# Altium PCB PCB7.PcbDoc (part 1 of 2)
Units mil, origin at the board's own origin, x right, y up, seen from the top; angles counter-clockwise.
Board outline 3935 x 3935 mil, 2 copper layers (Top Layer, Bottom Layer); 49 components, 133 nets, 415 pads, 69 vias.
Unrouted connection lines stored in the file: 1.
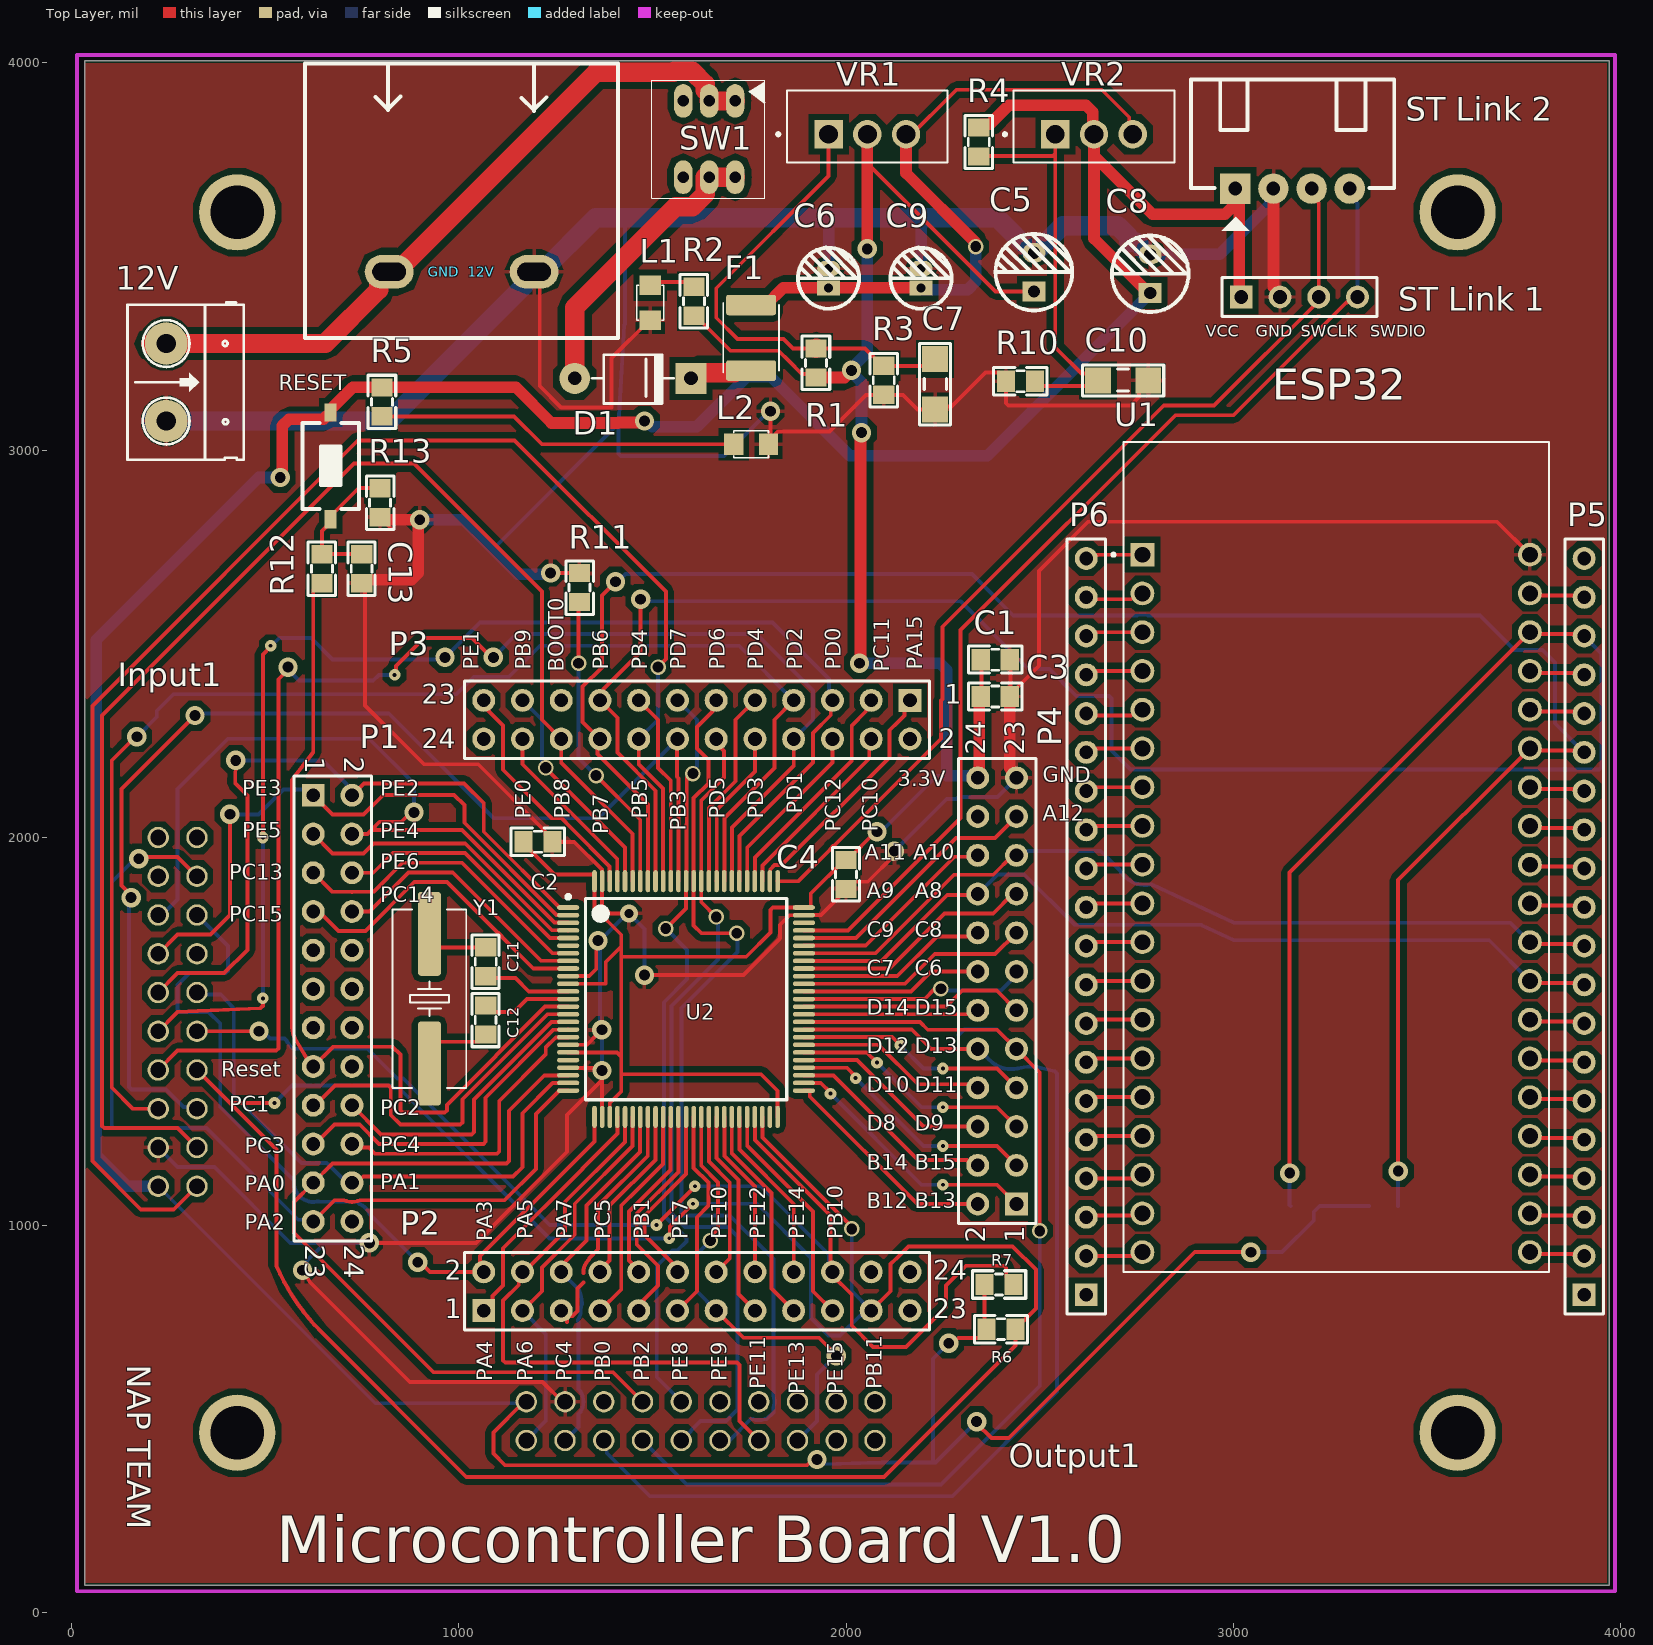
[diagram p0: Top Layer view]
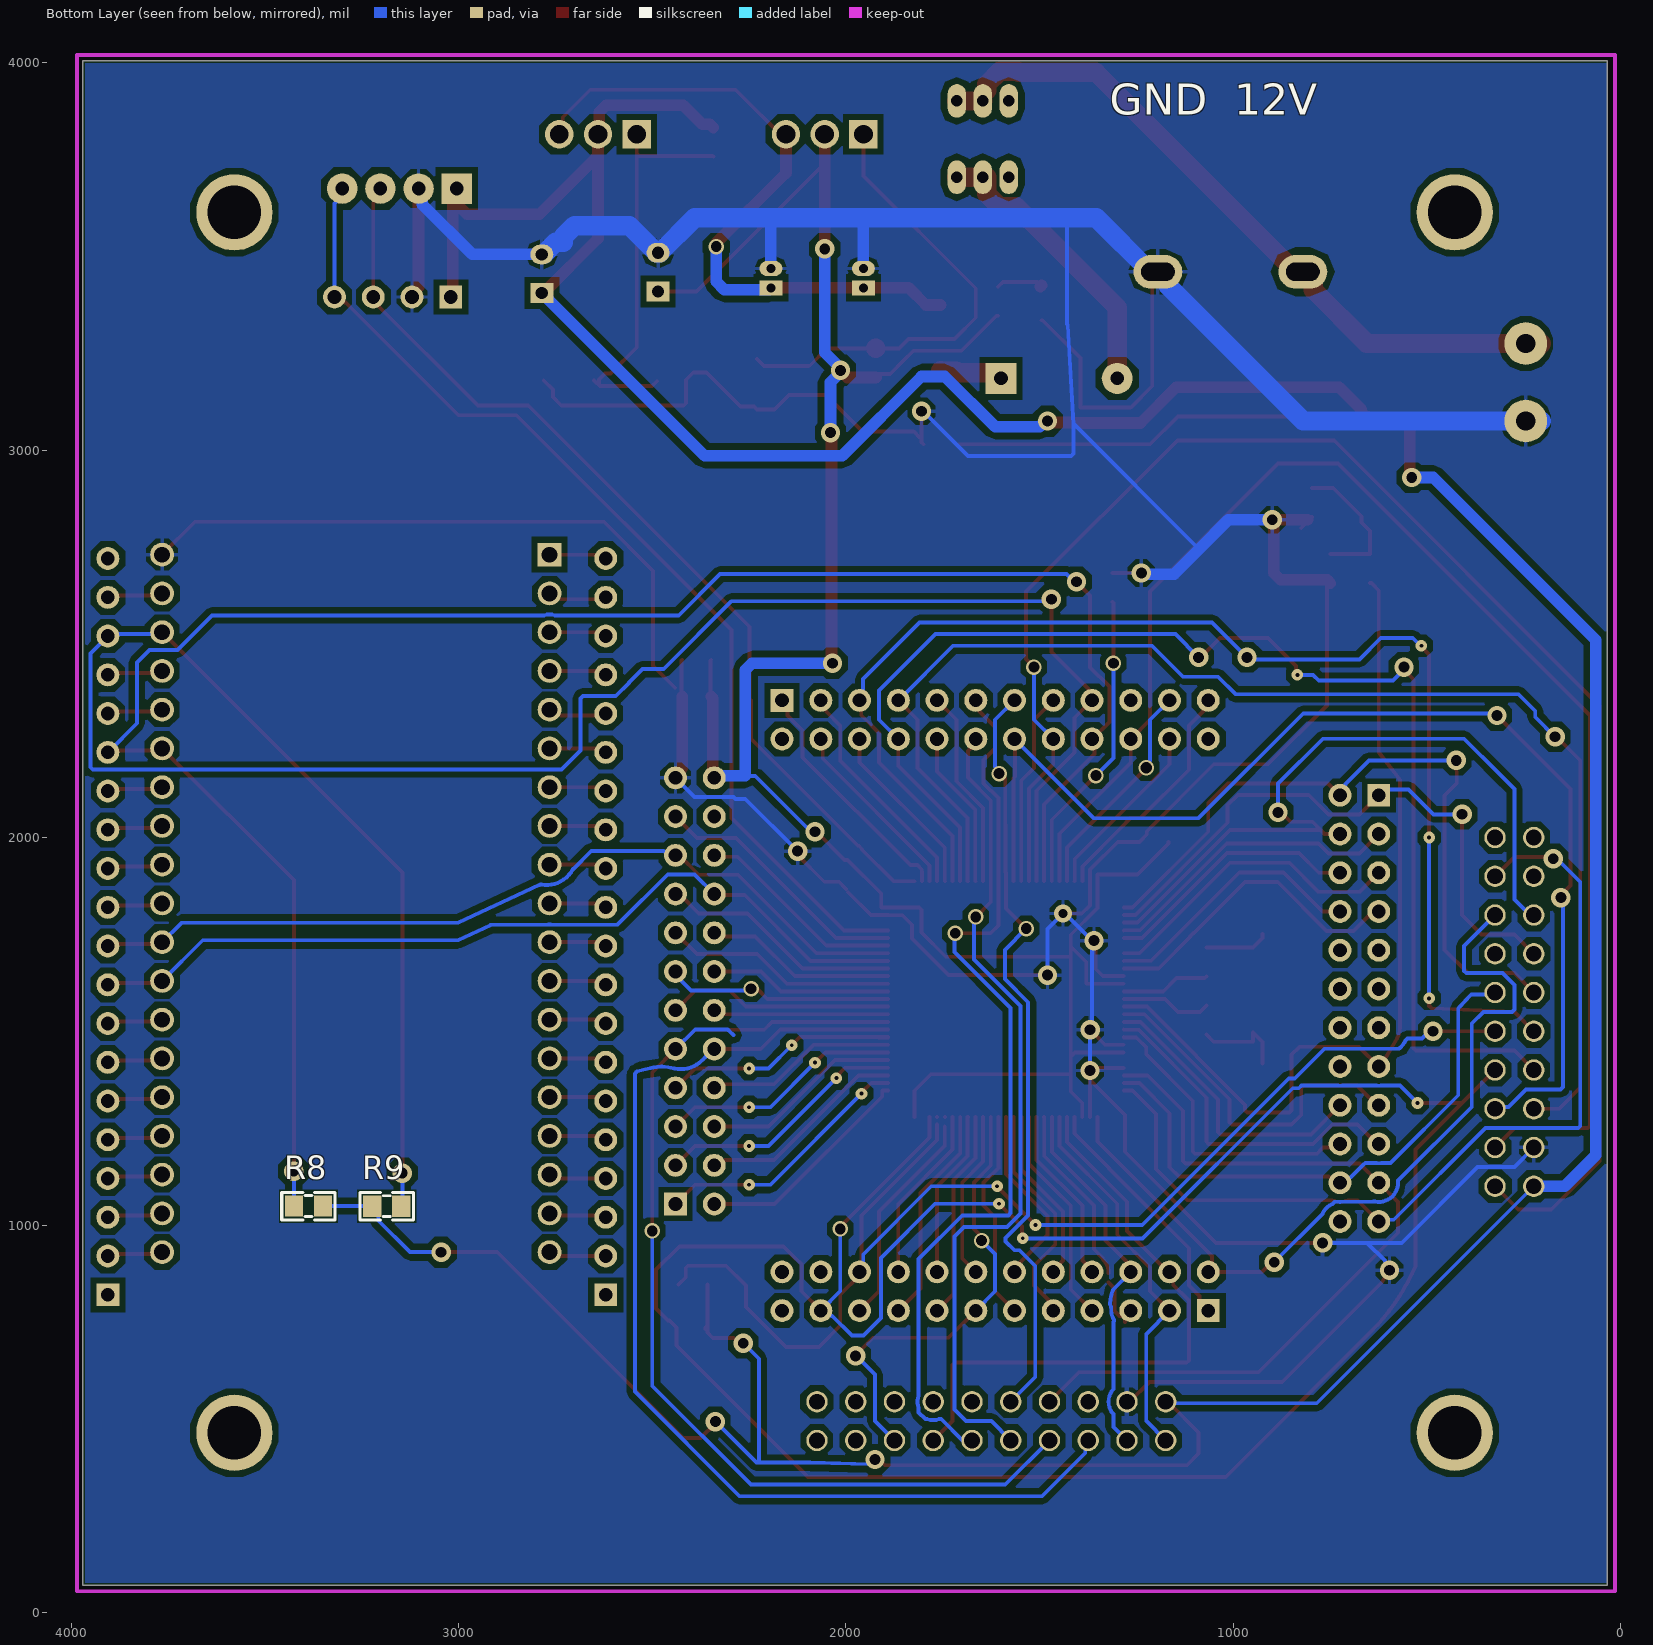
[diagram p1: Bottom Layer view, seen from below]
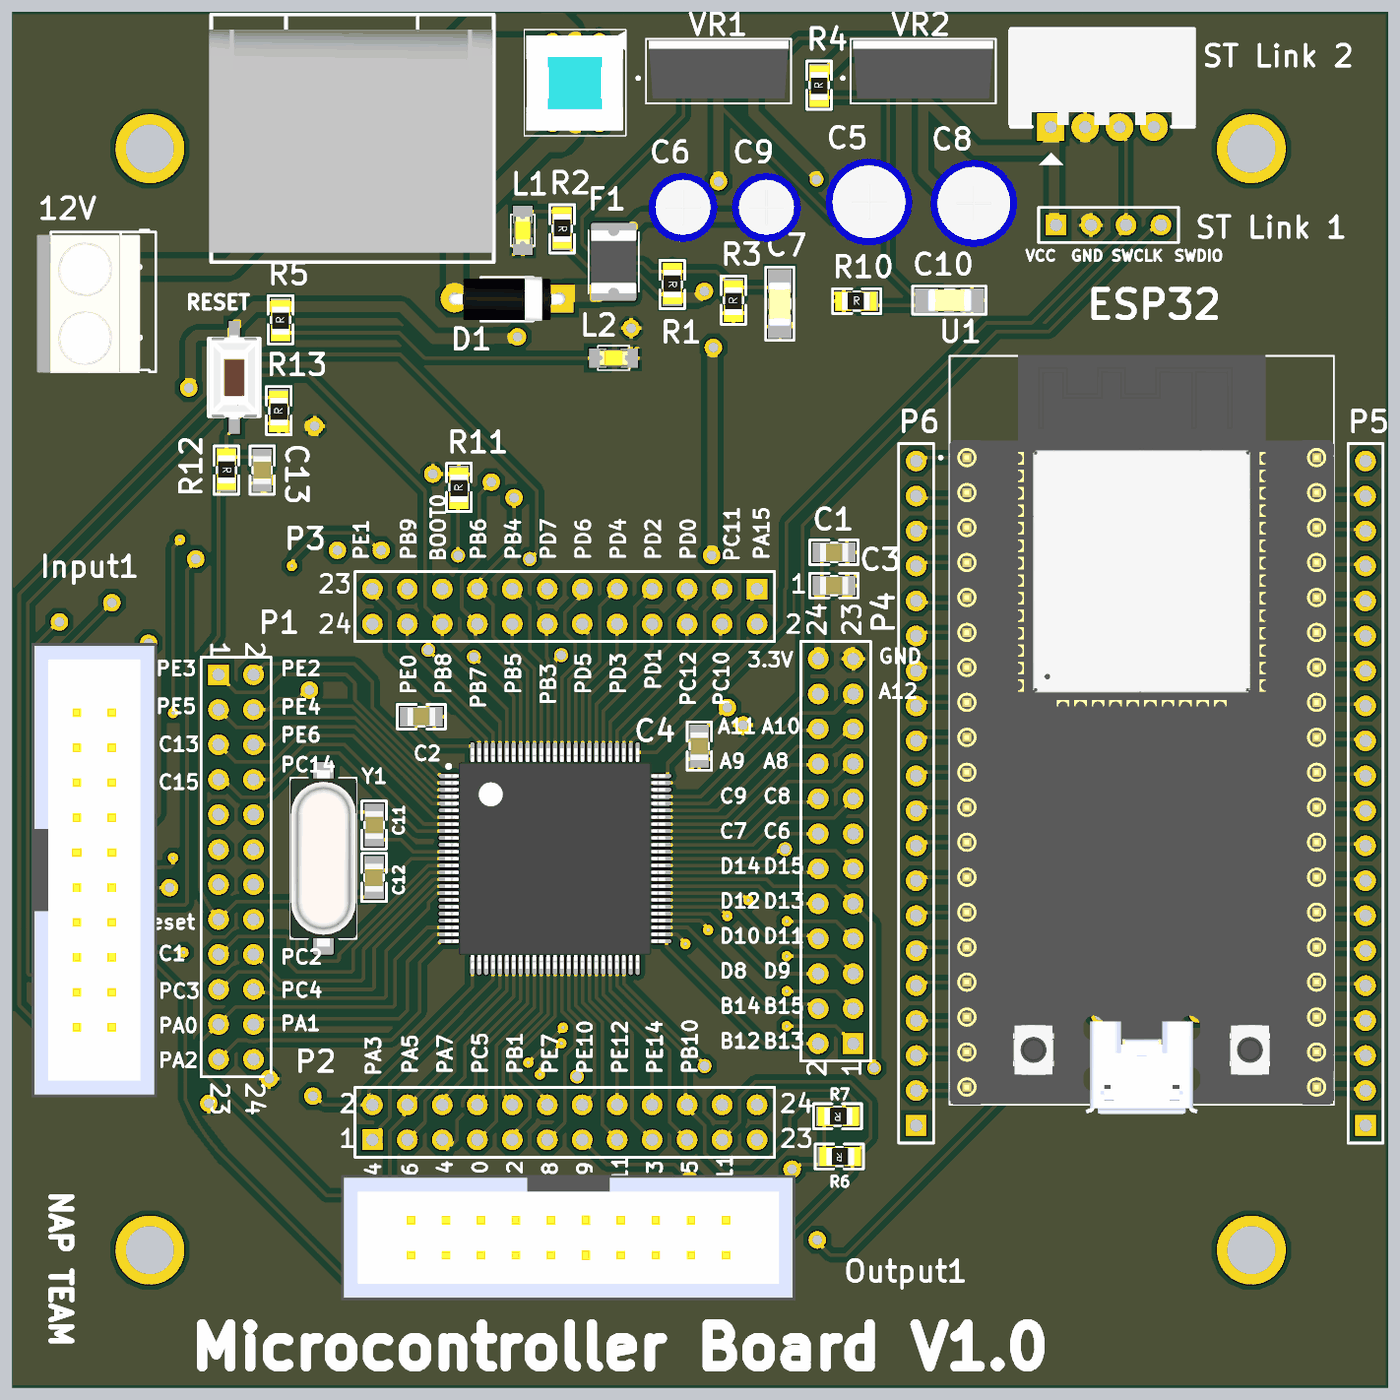
[diagram p3: 3D render of the assembled board from above, using the file's embedded part models]

## Layer stack, top to bottom
Top Solder: solder mask 0.4, Solder Resist, Dk 3.5
Top Layer: signal copper 1.4
Dielectric 1: dielectric 12.6, FR-4, Dk 4.8
Bottom Layer: signal copper 1.4
Bottom Solder: solder mask 0.4, Solder Resist, Dk 3.5

## Board outline
35,70 3970,70 3970,4005 35,4005

## Design rules (kind name [scope] priority, off if disabled: settings)
Clearance [All] p1: gap=15 ignorepadtopadclearanceinfootprint=TRUE
PolygonConnect [All] p1: connectstyle=Relief reliefconductorwidth=10 reliefentries=4 polygonreliefangle="90 Angle" airgapwidth=10
RoutingVias [All] p1: holewidth=20 width=35 viastyle="Through Hole" minholewidth=15 minwidth=30 maxholewidth=30 maxwidth=40
SolderMaskExpansion [All] p1: expansion=4 istentingtop=FALSE
Width [All] p1: maxlimit=50 minlimit=10 preferedwidth=30
30 further rules are at their usual default settings.

## Components (designator, comment, footprint, x,y, rotation, side; value= is the part's Value field where it differs from the comment)
12V "Header 2_1" HED2 245.63,3275 r270 top value="Header 2"
C1 "104" "tu 0805" 2385,2459.13 r0 top
C2 "104" "tu 0805" 1205,1989.13 r0 top
C3 "104" "tu 0805" 2385,2364.13 r0 top
C4 "104" "tu 0805" 2000,1905 r270 top
C5 "100uF" "tu hoa 5mm" 2485,3459.13 r90 top
C6 "10uF" "tu hoa 4mm" 1955,3443.54 r90 top
C7 "103" "tu 1206" 2230,3170 r270 top
C8 "100uF" "tu hoa 5mm" 2785,3455 r90 top
C9 "10uF" "tu hoa 4mm" 2193.81,3443.54 r90 top
C10 "103" "tu 1206" 2715,3180 r0 top
C11 "104" "tu 0805" 1070,1679.13 r90 top
C12 "104" "tu 0805" 1070,1529.13 r270 top
C13 "104" "tu 0805" 750,2694.13 r270 top
D1 "100v" "DIODE 1A" 1250,3185 r180 top
F1 "2A 24V" "Cau chi tu phuc hoi 2A 24V SMD1812" 1755,3289.65 r90 top
"GND  12V" "Component_1" CONN-TH_2P-P9.50_HB9500-9.5-2P 1007.99,3460 r180 top (schematic designator Header_1)
Input1 "Component_1" PCBComponent_1 225,1100 r90 top locked
L1 "LED 0805" LED-0805-Yellow 1495,3425 r270 top
L2 "LED 0805" LED-0805-Yellow 1710,3015 r0 top
Output1 "Component_1" PCBComponent_1 1175,544.13 r0 top locked
P1 "Header 12X2" HDR2X12 625,2109.13 r270 top locked
P2 "Header 12X2" HDR2X12 1065,779.13 r0 top
P3 "Header 12X2" HDR2X12 2165,2354.13 r180 top locked
P4 "Header 12X2" HDR2X12 2440,1054.13 r90 top
P5 "Header 20" HDR1X20 3905,820 r90 top
P6 "Header 20" HDR1X20 2620,820 r90 top
R1 "120R" "tro smd 0805" 1925,3225 r270 top
R2 "3.3k" "tro smd 0805" 1610,3384.13 r270 top
R3 "200R" "tro smd 0805" 2095,3180 r90 top
R4 "120R" "tro smd 0805" 2340,3795 r90 top
R5 "3.3k" "tro smd 0805" 800,3124.13 r90 top
R6 "4.7k" "tro smd 0805" 2400,729.13 r180 top
R7 "4.7k" "tro smd 0805" 2395,844.13 r180 top
R8 "4.7k" "tro smd 0805" 3387.23,1051.53 r180 bottom
R9 "4.7k" "tro smd 0805" 3185,1046.53 r0 bottom
R10 "200R" "tro smd 0805" 2450,3180 r0 top
R11 "10k" "tro smd 0805" 1310,2645 r90 top
R12 "2.2k" "tro smd 0805" 650,2694.13 r270 top
R13 "100R" "tro smd 0805" 795,2864.13 r90 top
RESET "Nut Nhan 2 Chan SMD 3x6x2.5" "Nut Nhan 2 Chan SMD 3x6x2.5" 670,2959.13 r90 top (schematic designator BT1)
"ST Link 1" "Header 4" HDR1X4 3019.93,3395.07 r0 top
"ST Link 2" "Header 4P 2.54 Duc Cong" "Header 4P DC 2.54" 3005.72,3676 r90 top
SW1 "SELF LOCK SWITCH" SW_70_31.5D47_TH_ST 1713.86,3900.98 r180 top
U1 "ESP32-DEVKITC-32D" MODULE_ESP32-DEVKITC-32D 3265,1952.05 r0 top locked
U2 "STM32F407xx-LQFP100" STM32_LQFP100 1587.2,1583.27 r0 top locked
VR1 "LM1117T-3.3/NOPB" TO254P1054X470X1955-3 2055,3815 r0 top
VR2 "LM1117T-3.3/NOPB" TO254P1054X470X1955-3 2640,3815 r0 top
Y1 "16Mhz" "Thach Anh 2 chan SMD" 925,1584.13 r90 top value=4Mhz

## Footprints (in the part's own frame and the unit in brackets; to place one, negate y for a bottom-side part, rotate by r counter-clockwise, add the part's x,y. Pads: shape width x height; smd on the part's side, far side on the other; paste and mask are expansions set on the pad)
"Cau chi tu phuc hoi 2A 24V SMD1812" [mm]
  rrect25% 1.34x3.29 smd: 1(-2.15,0) 2(2.15,0)
  silkscreen extent -2.28,-1.83 2.28,1.83, body extent -2.27,-1.62 2.27,1.62, height 1.25
CONN-TH_2P-P9.50_HB9500-9.5-2P [mm]
  oval 3.2x2.2 hole 1.2 slot 2.2 at 0 deg paste+0 mask+0.051: 1(4.75,0) 2(-4.75,0)
  silkscreen extent -10.26,-13.65 10.26,4.35, body extent -10.19,-12.54 10.41,3.65, height 19.04
"DIODE 1A" [mil] "Diode 1A"
  round 80 hole 35: 1(-50,0)
  rect 80x80 hole 35: 2(-350,0)
  silkscreen extent -305,-61 -95,65, body extent -366,-61 -34,65, height 122
HDR1X4 [mm] "Connector; Header; 4 Position"
  rect 1.5x1.5 hole 0.9: 1(0,0)
  round 1.5 hole 0.9: 2(2.54,0) 3(5.08,0) 4(7.62,0)
  silkscreen extent -1.27,-1.27 8.89,1.27
HDR1X20 [mm] "Connector; Header; 20 Position"
  rect 1.5x1.5 hole 0.9: 1(0,0)
  round 1.5 hole 0.9: 2(2.54,0) 3(5.08,0) 4(7.62,0) 5(10.16,0) 6(12.7,0) 7(15.24,0) 8(17.78,0) 9(20.32,0) 10(22.86,0) 11(25.4,0) 12(27.94,0) 13(30.48,0) 14(33.02,0) 15(35.56,0) 16(38.1,0) 17(40.64,0) 18(43.18,0) 19(45.72,0) 20(48.26,0)
  silkscreen extent -1.27,-1.27 49.53,1.27
HDR2X12 [mm] "Connector; Header; 12x2 Position"
  rect 1.5x1.5 hole 0.9: 1(0,0)
  round 1.5 hole 0.9: 2(0,2.54) 3(2.54,0) 4(2.54,2.54) 5(5.08,0) 6(5.08,2.54) 7(7.62,0) 8(7.62,2.54) 9(10.16,0) 10(10.16,2.54) 11(12.7,0) 12(12.7,2.54) 13(15.24,0) 14(15.24,2.54) 15(17.78,0) 16(17.78,2.54) 17(20.32,0) 18(20.32,2.54) 19(22.86,0) 20(22.86,2.54) 21(25.4,0) 22(25.4,2.54) 23(27.94,0) 24(27.94,2.54)
  silkscreen extent -1.27,-1.27 29.21,3.81
"Header 4P DC 2.54" [mil]
  rect 78.74x78.74 hole 35: 1(-1,1)
  round 78.74 hole 35: 2(-1,-97.42) 3(-1,-195.85) 4(-1,-294.28)
  silkscreen extent -110,-409 280,115, body extent 5,-413 278,123, height 290
HED2 [mil] "Header 2, 2 pin, hight 300mil, Pin to Pin 200, Colour Green"
  round 110 hole 50: 1(0,0) 2(200,0)
  silkscreen extent -106,-100 300,200, body extent -92,-140 302,155, height 394
LED-0805-Yellow [mil]
  rect 50x55 smd: 1(0,0) 2(90,0)
  silkscreen extent 0,-35 90,35, body extent 5,-25 85,25, height 43
MODULE_ESP32-DEVKITC-32D [mm]
  rect 1.56x1.56 / inner round 1.56 / far side rect 1.56x1.56 hole 1.04: J2-1(-12.7,19.76)
  round 1.56 hole 1.04: J2-2(-12.7,17.22) J2-3(-12.7,14.68) J2-4(-12.7,12.14) J2-5(-12.7,9.6) J2-6(-12.7,7.06) J2-7(-12.7,4.52) J2-8(-12.7,1.98) J2-9(-12.7,-0.56) J2-10(-12.7,-3.1) J2-11(-12.7,-5.64) J2-12(-12.7,-8.18) J2-13(-12.7,-10.72) J2-14(-12.7,-13.26) J2-15(-12.7,-15.8) J2-16(-12.7,-18.34) J2-17(-12.7,-20.88) J2-18(-12.7,-23.42) J2-19(-12.7,-25.96) J3-1(12.7,19.76) J3-2(12.7,17.22) J3-3(12.7,14.68) J3-4(12.7,12.14) J3-5(12.7,9.6) J3-6(12.7,7.06) J3-7(12.7,4.52) J3-8(12.7,1.98) J3-9(12.7,-0.56) J3-10(12.7,-3.1) J3-11(12.7,-5.64) J3-12(12.7,-8.18) J3-13(12.7,-10.72) J3-14(12.7,-13.26) J3-15(12.7,-15.8) J3-16(12.7,-18.34) J3-17(12.7,-20.88) J3-18(12.7,-23.42) J3-19(12.7,-25.96)
  silkscreen extent -14.7,-27.25 13.95,27.15, body extent -13.97,-27.9 13.97,27.2, height 6.69
"Nut Nhan 2 Chan SMD 3x6x2.5" [mm] "Switch SMD type"
  rect 1.2x0.8 smd: 1(-3.5,0) 2(3.5,0)
  silkscreen extent -2.82,-1.85 2.82,1.85, body extent -3.05,-1.85 3.05,1.85, height 2.5
PCBComponent_1 [mm]
  round 1.4 hole 1.04: 1(0,0) 1(0,0) 1(0,0) 1(0,0) 1(0,0) 2(2.54,0) 3(5.08,0) 4(7.62,0) 5(10.16,0) 6(12.7,0) 7(15.24,0) 8(17.78,0) 9(20.32,0) 10(22.86,0) 11(0,-2.54) 12(2.54,-2.54) 13(5.08,-2.54) 14(7.62,-2.54) 15(10.16,-2.54) 16(12.7,-2.54) 17(15.24,-2.54) 18(17.78,-2.54) 19(20.32,-2.54) 20(22.86,-2.54)
  body extent -5.06,-5.69 27.94,3.41, height 9
STM32_LQFP100 [mm] "TSQFP, 100-Leads, Body 14.00x14.00mm, Pitch 0.50mm, IPC Medium Density"
  oval 1.45x0.3 smd: 1(-7.725,6) 2(-7.725,5.5) 3(-7.725,5) 4(-7.725,4.5) 5(-7.725,4) 6(-7.725,3.5) 7(-7.725,3) 8(-7.725,2.5) 9(-7.725,2) 10(-7.725,1.5) 11(-7.725,1) 12(-7.725,0.5) 13(-7.725,0) 14(-7.725,-0.5) 15(-7.725,-1) 16(-7.725,-1.5) 17(-7.725,-2) 18(-7.725,-2.5) 19(-7.725,-3) 20(-7.725,-3.5) 21(-7.725,-4) 22(-7.725,-4.5) 23(-7.725,-5) 24(-7.725,-5.5) 25(-7.725,-6) 51(7.725,-6) 52(7.725,-5.5) 53(7.725,-5) 54(7.725,-4.5) 55(7.725,-4) 56(7.725,-3.5) 57(7.725,-3) 58(7.725,-2.5) 59(7.725,-2) 60(7.725,-1.5) 61(7.725,-1) 62(7.725,-0.5) 63(7.725,0) 64(7.725,0.5) 65(7.725,1) 66(7.725,1.5) 67(7.725,2) 68(7.725,2.5) 69(7.725,3) 70(7.725,3.5) 71(7.725,4) 72(7.725,4.5) 73(7.725,5) 74(7.725,5.5) 75(7.725,6)
  oval 0.3x1.45 smd: 26(-6,-7.725) 27(-5.5,-7.725) 28(-5,-7.725) 29(-4.5,-7.725) 30(-4,-7.725) 31(-3.5,-7.725) 32(-3,-7.725) 33(-2.5,-7.725) 34(-2,-7.725) 35(-1.5,-7.725) 36(-1,-7.725) 37(-0.5,-7.725) 38(0,-7.725) 39(0.5,-7.725) 40(1,-7.725) 41(1.5,-7.725) 42(2,-7.725) 43(2.5,-7.725) 44(3,-7.725) 45(3.5,-7.725) 46(4,-7.725) 47(4.5,-7.725) 48(5,-7.725) 49(5.5,-7.725) 50(6,-7.725) 76(6,7.725) 77(5.5,7.725) 78(5,7.725) 79(4.5,7.725) 80(4,7.725) 81(3.5,7.725) 82(3,7.725) 83(2.5,7.725) 84(2,7.725) 85(1.5,7.725) 86(1,7.725) 87(0.5,7.725) 88(0,7.725) 89(-0.5,7.725) 90(-1,7.725) 91(-1.5,7.725) 92(-2,7.725) 93(-2.5,7.725) 94(-3,7.725) 95(-3.5,7.725) 96(-4,7.725) 97(-4.5,7.725) 98(-5,7.725) 99(-5.5,7.725) 100(-6,7.725)
  silkscreen extent -7.85,-6.6 6.6,6.82, body extent -8,-8 8,8, height 1.6
SW_70_31.5D47_TH_ST [mm] "CASE: TH"
  oval 1.2x2.2 hole 0.75: 0(3.4,5) 0(3.4,0) 1(0,0) 2(1.7,0) 3(1.7,5) 4(0,5)
  silkscreen extent -1.98,-1.35 5.46,6.38, body extent -1.74,-0.91 5.3,5.99, height 13.54
"Thach Anh 2 chan SMD" [mm] "SMD Crystal HC49/US-SM package"
  round 0.508 on Mech15: 0(0,0)
  rrect25% 5.5x1.5 smd: 1(-4.25,0) 2(4.25,0)
  silkscreen extent -5.84,-2.41 5.84,2.41, body extent -6.4,-2.41 6.4,2.42, height 4.29
TO254P1054X470X1955-3 [mm]
  rect 1.86x1.86 / inner round 1.86 / far side rect 1.86x1.86 hole 1.24: 1(-2.54,0)
  round 1.86 hole 1.24: 2(0,0) 3(2.54,0)
  silkscreen extent -5.94,-1.84 5.27,2.86, body extent -5.08,-1.48 5.08,2.71, height 22.86
"tro smd 0805" [mm]
  rect 1.2x1.4 smd: 1(-0.946,-0.061) 2(0.954,-0.061)
  silkscreen extent -1.75,-0.97 1.75,0.84, body extent -1.56,-0.76 1.44,0.64, height 0.53
"tu 0805" [mm] "Compoment SMD 80x50mil"
  rect 1.2x1.4 smd: 1(-0.946,-0.003) 2(0.954,-0.003)
  silkscreen extent -1.75,-0.89 1.75,0.89, body extent -1.01,-0.64 1.01,0.63, height 0.61
"tu 1206" [mm]
  rect 1.7x1.7 smd: 1(-1.65,0) 2(1.65,0)
  silkscreen extent -2.67,-1.02 2.67,1.02, body extent -1.57,-0.8 1.63,0.8, height 0.94
"tu hoa 4mm" [mm]
  rect 1x1.5 hole 0.6: 1(-0.635,0)
  oval 1x1.5 hole 0.6: 2(0.635,0)
  silkscreen extent -2,-2 2.01,2.01, body extent -2.47,-2.47 2.58,2.58, height 14.81
"tu hoa 5mm" [mm]
  rect 1.3x1.5 hole 0.8: 1(-1.27,0)
  oval 1.3x1.5 hole 0.8: 2(1.27,0)
  silkscreen extent -2.51,-2.51 2.51,2.51, body extent -3.12,-3.18 3.23,3.18, height 14.55

## Part data
12V: "Header, 2-Pin", Manufacturer="Generic Components", Class=Connector
C1 C2 C3 C4 C11 C12 C13: library part "Tu 0805 104 50V 10%", "Dán", Chung_Loai=Dán, Don_Vi=Con, Ma_Hang=MH004551, So_Chan=2, Ten_Linh_Kien="Tụ 0805 104-100nF 10% 50V"
C5 C8: library part "Tu Hoa 100uF 16V 5x11", "Cắm", Chung_Loai=Cắm, Don_Vi=Con, Ma_Hang=MH008417, So_Chan=2, Ten_Linh_Kien="Tụ Hóa 100uF 16V 5x11MM"
C6 C9: library part "Tu Hoa 10uF 25V 4x7", "Cắm", Chung_Loai=Cắm, Don_Vi=Con, Ma_Hang=MH001349, So_Chan=2, Ten_Linh_Kien="Tụ Hóa 10uF 25V 4x7MM"
C7 C10: library part "Tu 1206 103 50V 10%", "Dán", Chung_Loai=Dán, Don_Vi=Con, Ma_Hang=MH004543, So_Chan=2, Ten_Linh_Kien="Tụ 1206 103-10nF 10% 50V"
D1: library part "Diode 1N4007", "Cắm", Chung_Loai=Cắm, Don_Vi=Con, Ma_Hang=MH001063, Ten_Linh_Kien="Diode 1N4007 1A (DIP)"
F1: library part "Cau chi tu phuc hoi 2A 24V SMD1812", "2A 24V SMD1812", Ma_Hang=MH010033, Ten="Cầu Chì Tự Phục Hồi 2A 24V SMD1812"
Input1 Output1: "DC3_20pin"
L1 L2: library part "LED 0805 Trang", "Dán", Chung_Loai=Dán, Don_Vi=Con, Ma_Hang=MH002946, Ten_Linh_Kien="LED 0805 Màu Trắng ( White)"
P1 P2 P3 P4: "Header, 12-Pin, Dual row", LatestRevisionDate=17-Jul-2002, LatestRevisionNote="Re-released for DXP Platform.", Publisher="Altium Limited"
P5 P6: "Header, 20-Pin", LatestRevisionDate=17-Jul-2002, LatestRevisionNote="Re-released for DXP Platform.", Publisher="Altium Limited"
R1 R4: library part "Tro 0805 5% 120R", "Dán", Chung_Loai=Dán, Don_Vi=Con, Ma_Hang=MH005253, So_Chan=2, Ten_Linh_Kien="Trở 0805 5% 120R"
R2 R5: library part "Tro 0805 1% 3.3k", "Dán", Chung_Loai=Dán, Don_Vi=Con, Ma_Hang=MH005472, So_Chan=2, Ten_Linh_Kien="Trở 0805 1% 3.3k"
R3 R10: library part "Tro 0805 5% 200R", "Dán", Chung_Loai=Dán, Don_Vi=Con, Ma_Hang=MH005257, So_Chan=2, Ten_Linh_Kien="Trở 0805 5% 200R"
R6 R7 R8 R9: library part "Tro 0805 5% 4.7k", "Dán", Chung_Loai=Dán, Don_Vi=Con, Ma_Hang=MH005307, So_Chan=2, Ten_Linh_Kien="Trở 0805 5% 4.7k"
R11: library part "Tro 0805 5% 10k", "Dán", Chung_Loai=Dán, Don_Vi=Con, Ma_Hang=MH005239, So_Chan=2, Ten_Linh_Kien="Trở 0805 5% 10k"
R12: library part "Tro 0805 5% 2.2k", "Dán", Chung_Loai=Dán, Don_Vi=Con, Ma_Hang=MH005237, So_Chan=2, Ten_Linh_Kien="Trở 0805 5% 2.2k"
R13: library part "Tro 0805 5% 100R", "Dán", Chung_Loai=Dán, Don_Vi=Con, Ma_Hang=MH005251, So_Chan=2, Ten_Linh_Kien="Trở 0805 5% 100R"
"ST Link 1": "Header, 4-Pin", LatestRevisionDate=17-Jul-2002, LatestRevisionNote="Re-released for DXP Platform.", Publisher="Altium Limited"
"ST Link 2": "Cắm", Chung_Loai=Cắm, Don_Vi=Con, Ma_Hang=MH001310, Ten_Linh_Kien="Header 4P XH2.54-4P Đực Cong"
SW1: library part SW1_LOCAL-TH, "6 Pin DPDT Mini Push Button Self-locking Switch Multimeter Switch", Alternate Part Number-1=NA, Case/Package=TH, Manufacturer=NA, Manufacturer Part Number=NA, Supplier Part Number-1=NA, Supplier-1="SP ROAD"
U1: "WiFi Development Tools (802.11) ESP32 General Development Kit, ESP32-WROOM-32D on the board", Package=None, Check_prices=https://www.snapeda.com/parts/ESP32-DEVKITC-32D/Espressif+Systems/view-part/?ref=eda, MF="Espressif Systems", MP=ESP32-DEVKITC-32D, SnapEDA_Link=https://www.snapeda.com/parts/ESP32-DEVKITC-32D/Espressif+Systems/view-part/?ref=snap
VR1 VR2: "800-mA 15-V linear voltage regulator", Package="TO-220-3 Texas Instruments", Availability="In Stock", Check_prices=https://www.snapeda.com/parts/LM1117T-3.3/NOPB/Texas+Instruments/view-part/?ref=eda, MF="Texas Instruments", MP=LM1117T-3.3/NOPB, Price=None, Purchase-URL=https://pricing.snapeda.com/search/part/LM1117T-3.3/NOPB/?ref=eda, SnapEDA_Link=https://www.snapeda.com/parts/LM1117T-3.3/NOPB/Texas+Instruments/view-part/?ref=snap
Y1: library part "Thach Anh 2 chan SMD", "Crystal For all Crystal 2pin."
RESET: Ma_Hang=MH001036, Ten="Nút Nhấn 2 Chân 3x6x2.5MM SMD"

## Free pads (board coordinates)
  round 196.85 hole 137.8: 2(428.7,463.7) 2(428.7,3613.31) 2(3578.31,463.7) 2(3578.31,3613.31)

## Via types
v1: diameter 50, hole 28, Top Layer to Bottom Layer, 38 vias
v2: diameter 30, hole 10, Top Layer to Bottom Layer, 17 vias
v3: diameter 40, hole 28, Top Layer to Bottom Layer, 12 vias
v4: diameter 40, hole 30, Top Layer to Bottom Layer, 1 vias
v5: diameter 47.24, hole 23.62, Top Layer to Bottom Layer, 1 vias

## Nets (pads, with @x,y where several pads share a name; then routed paths per layer and width w, separated by ;. In a path a pad name is that pad's centre, name@x,y a point inside that pad or via, vN(x,y) a via of type N, cw(c..) or ccw(c..) an arc to the next point about the centre after c; other vN are vias at no path point)
"+3.3 VDK": C1.1 C2.1 C3.1 C4.1 C5.1 P4.24 R1.2 R2.2 U2.11 U2.20 U2.28 U2.50 U2.75 U2.100 VR1.2 | length 6139.7
  Top Layer w10: C2.1@1167.77,1989 1167.77,1985.06 1247.8,1905.04 1350.15,1905.04 1350.98,1904.2 1350.98,1818.15 1420,1749.13 1420,1719.13 ; U2.20@1283.07,1445.47 1408.66,1445.47 1420,1434.13 ; U2.11@1283.07,1622.64 1380,1622.64 1380,1679.13 1420,1719.13 ; U2.28@1390.35,1279.13 1390.35,1315.35 1420,1345 1420,1389.13 ; R2.2@1607.61,3346.56 1611.54,3346.56 1701.72,3256.38 1826.26,3256.38 1853.15,3229.48 1885.91,3196.73 1913.3,3196.73 R1.2@1922.61,3187.43 ; U2.50@1823.43,1279.13 1823.43,1346.57 1780.87,1389.13 1420,1389.13 ; 2055,3740 2385.87,3409.13 C5.1@2485,3409.13 ; v1(2080,2015) 2076.57,2015 2003.8,1942.23 C4.1@1999.87,1942.23 1995.93,1942.23 1908.98,1855.28 1908.98,1820.33 1908.14,1819.49 U2.75@1891.34,1819.49 1890.99,1819.14 1810.86,1819.14 1805,1813.28 1805,1755 1742.53,1692.53 1420,1692.53 ; C3.1@2347.77,2364 2350,2366.23 2350,2456.77 C1.1@2347.77,2459 ; 1420,1389.13 1420,1434.13 ; 1420,1434.13 1420,1692.53 ; 1420,1692.53 1420,1719.13
  Top Layer w30: R1.2@1922.61,3187.43 1997.19,3187.43 2014.32,3204.55 v1(2014.32,3205.71) ; v1(2035,2450) 2037.5,2452.5 2037.5,3042.5 v1(2040,3045) ; v1(2055,3519.13) 2055,3740 VR1.2@2055,3800 ; P4.24@2340,2154.13 2343.89,2158.02 2343.89,2360.11 C3.1@2347.77,2364
  Bottom Layer w10: v1(2080,2015) 2090,2015 2234.13,2159.13 2260,2159.13
  Bottom Layer w30: v1(2035,2450) 2242.43,2450 2260,2432.43 2260,2159.13 2335,2159.13 P4.24@2340,2154.13 ; v1(2040,3045) 2040,3174.62 2014.32,3200.3 2014.32,3211.13 2055,3251.81 v1(2055,3519.13)
+12: 12V.1 "GND  12V.1" SW1.1 SW1.2 | length 1856
  Top Layer w50: 12V.1@205,3275 213.52,3266.48 255.77,3266.48 264.29,3275 655.66,3275 794.29,3413.62 794.29,3443.09 811.2,3460 840.66,3460 1355.66,3975 1554.25,3975 1556.55,3977.29 1603.45,3977.29 1636.62,3944.12 1636.62,3928.22 SW1.2@1645.55,3919.29 ; SW1.2@1646.93,3900.98 SW1.1@1713.86,3900.98
Boot0: R11.1 U2.94 | length 787.3
  Top Layer w10: v3(1310,2450) 1310,2605.38 R11.1@1312.39,2607.77 ; v3(1355,2160) 1469.09,2045.91 U2.94@1469.09,1887.4
  Bottom Layer w10: v3(1310,2450) 1310,2205 v3(1355,2160)
Buzzer: Input1.17
CLK: Input1.13 P3.14 U2.89 | length 3060.7
  Top Layer w10: v1(155,1845) 155,1851.57 130,1876.57 130,2125 v1(320,2315) ; P3.14@1565,2254.13 1563.67,2252.8 1563.67,2156.79 1567.52,2152.94 U2.89@1567.52,1887.4
  Bottom Layer w10: v1(155,1845) 150,1840 150,1355.86 155.86,1350 245,1350 289.91,1305.09 319.91,1305.09 Input1.13@325,1300 ; v1(320,2315) 325,2320 820,2320 1090,2050 1360.87,2050 P3.14@1565,2254.13
CS: Input1.12 P3.20 U2.95 | length 3712.9
  Top Layer w10: Input1.12@325,1200 275,1250 85.86,1250 80,1255.86 80,2315 730,2965 885,2965 1215,2635 1215,2304.13 P3.20@1265,2254.13 1265,2194.13 1449.41,2009.72 U2.95@1449.41,1887.4
Den_Run: Input1.6 P1.2 U2.1 | length 1870.8
  Top Layer w10: Input1.6@225,1600 275,1650 395,1650 455,1710 455,2108.63 426.69,2136.95 423.76,2139.87 423.76,2144.24 v1(425,2199.13) ; P1.2@725,2109.13 755.87,2140 1014.13,2140 1065,2089.13 1065,2015 1260.51,1819.49 U2.1@1283.07,1819.49
  Bottom Layer w10: v1(425,2199.13) 650,2199.13 711.01,2138.12 711.01,2136.39 725,2122.41 P1.2@725,2109.13
Den_Stop: Input1.7 P1.1 U2.2 | length 1589.2
  Top Layer w10: Input1.7@225,1700 275,1750 360,1750 410,1800 v1(410,2060) ; P1.1@625,2109.13 675,2059.13 755,2059.13 805.87,2110 988.63,2110 1015,2083.63 1015,2038.19 1253.04,1800.15 1282.72,1800.15 U2.2@1283.07,1799.8
  Bottom Layer w10: v1(410,2060) 484.01,2060 548.15,2124.13 610,2124.13 P1.1@625,2109.13
Den_Warning: Input1.8 P1.4 U2.3 | length 1927.8
  Top Layer w10: P1.4@725,2009.13 765,2009.13 775,2019.13 ; v1(885,2065) 876.95,2065 852.69,2040.74 796.61,2040.74 775,2019.13 ; U2.3@1283.07,1780.12 1282.72,1780.46 1247.26,1780.46 1008.6,2019.13 775,2019.13
  Bottom Layer w10: Input1.8@225,1800 235,1800 275,1840 275,2125 315,2165 405,2255 769.13,2255 885,2139.13 v1(885,2065)
DIN: Input1.11 P3.16 U2.91 | length 4249.7
  Top Layer w10: Input1.11@325,1100 265,1040 180,1040 55,1165 55,2340 740,3025 1145,3025 1535,2635 1535,2460.86 1515,2440.86 v3(1515,2440) ; P3.16@1465,2254.13 1465,2189.59 1528.15,2126.44 U2.91@1528.15,1887.4
  Bottom Layer w10: P3.16@1465,2254.13 1515,2304.13 v3(1515,2440)
DIR_L: Output1.15 P3.12 U2.86 | length 2156.6
  Top Layer w10: v3(1665,1795) 1626.57,1833.43 U2.86@1626.57,1887.4 1626.57,2096.12 1685,2154.54 1685,2223.75 1665,2243.75 P3.12@1665,2254.13
  Bottom Layer w10: Output1.15@1575,444.13 1625,494.13 1690,494.13 1720,524.13 1720,970 1695,995 1584.81,995 1550,1029.81 1550,1565 1670,1685 1670,1790 v3(1665,1795) ; P3.12@1655.61,2244.75 P3.12@1665,2254.13
DIR_R: Output1.16 P3.11 U2.87 | length 2387.6
  Top Layer w10: P3.11@1665,2354.13 1655.61,2344.75 1655.61,2325.61 1615,2285 1615,2230 1645,2200 1645,2140 1606.89,2101.89 U2.87@1606.89,1887.4 1606.89,1773.11 1626.94,1753.06 v3(1718.06,1753.06)
  Bottom Layer w10: Output1.16@1675,444.13 1699.13,444.13 1754.08,499.08 1758.22,499.08 1759.78,499.08 ccw(c1775,544.13) 1789.06,498.7 cw(c1791.97,489.13) 1791.97,499.13 1795,499.13 1812.56,516.69 1812.56,528.83 ccw(c1775,544.13) 1812.56,559.44 1812.56,912.44 1700,1025 1580.86,1025 1575,1030.86 1575,1560 1720,1705 1720,1755 v3(1718.06,1753.06)
DIR_STEPPER: Output1.5 P3.13 U2.88 | length 2003.4
  Top Layer w10: v3(1535,1765) 1587.2,1817.2 U2.88@1587.2,1887.4 1587.2,1910.04 1587.98,1911.31 1587.98,1917.87 1588.89,2154.35 1594.35,2154.35 v3(1605,2165)
  Bottom Layer w10: v3(1535,1765) 1590,1710 1590,1635 1530,1575 1530,1024.36 1588.04,966.32 1588.04,958.04 1565,935 1552.53,935 1511.67,894.14 1511.67,607.46 Output1.5@1575,544.13 ; P3.13@1565,2354.13 1615,2304.13 1615,2183.12 1605,2173.12 v3(1605,2165)
Encoder_L1: Output1.13 P4.10 U2.59 | length 2875.9
  Top Layer w10: U2.59@1891.34,1504.53 2169.61,1504.53 2220,1454.13 P4.10@2340,1454.13
  Bottom Layer w10: Output1.13@1375,444.13 1382.59,436.54 1382.59,411.54 1494.13,300 2275,300 2545,570 2545,1387.22 2545,1388.75 2544.54,1390.22 ccw(c2535,1387.22) 2537.93,1396.78 ccw(c2432.17,1039.08) 2476.87,1409.4 ccw(c2475.7,1399.46) 2474.8,1409.42 ccw(c2496.65,1168.84) 2442.64,1404.3 cw(c2425.79,1479.31) 2378.42,1418.76 cw(c2433.9,1489.7) 2353.21,1449.71 P4.10@2352.07,1450.85 ; P4.10@2340,1454.13 2345.67,1453.75 2349.42,1453.5 P4.10@2352.04,1450.88
Encoder_L2: Output1.14 P4.9 U2.60 | length 2826.5
  Top Layer w10: U2.60@1891.34,1524.21 1891.42,1524.13 2190.87,1524.13 2210.87,1504.13 2390,1504.13 P4.9@2440,1454.13 2497.07,1397.06 2500,1394.13 v3(2500,985)
  Bottom Layer w10: Output1.14@1475,444.13 1589.13,330 2245,330 2500,585 v3(2500,985) ; 2290,1490 2300,1500 cw(c2320.17,1479.83) 2306.75,1505 2389.13,1505 P4.9@2440,1454.13
Encoder_R1: Output1.11 P2.3 U2.31 | length 998.4
  Top Layer w10: P2.3@1165,779.13 1215,829.13 1215,890 1300,975 1300,1055 1449.06,1204.06 1449.06,1278.79 U2.31@1449.41,1279.13
  Bottom Layer w10: P2.3@1165,779.13 1225,719.13 1225,494.13 Output1.11@1175,444.13
Encoder_R2: Output1.12 P2.6 U2.32 | length 960.3
  Top Layer w10: P2.6@1255,885 1330,960 1330,1050 1468.75,1188.75 1468.75,1278.79 U2.32@1469.09,1279.13
  Bottom Layer w10: P2.6@1265,879.13 1310.25,833.88 cw(c1228.79,796.43) 1311.05,832.09 cw(c1228.79,796.43) 1318.44,797.85 cw(c1308.44,797.69) 1317.95,794.61 ccw(c1365,779.13) 1315.57,776 cw(c1305.6,775.31) 1315.24,772.66 cw(c1228.79,796.43) 1309.69,757.78 ccw(c1318.74,753.54) 1309.18,750.62 ccw(c1314.64,752.33) 1309.31,750.24 1310,748.98 1310,576.33 cw(c1275,544.13) 1310,511.93 1310,479.13 Output1.12@1275,444.13
ESP_Pin_02: P5.19 U1.J3-2 | length 144.1
  Top Layer w10: U1.J3-2@3765,2630 3770,2625 3900,2625 P5.19@3905,2620
ESP_Pin_04: P5.17 U1.J3-4 | length 144.1
  Top Layer w10: U1.J3-4@3765,2430 3770,2425 3900,2425 P5.17@3905,2420
ESP_Pin_05: P5.16 U1.J3-5 | length 144.1
  Top Layer w10: U1.J3-5@3765,2330 3770,2325 3900,2325 P5.16@3905,2320
ESP_Pin_07: P5.14 U1.J3-7 | length 144.1
  Top Layer w10: U1.J3-7@3765,2130 3770,2125 3900,2125 P5.14@3905,2120
ESP_Pin_08: P5.13 U1.J3-8 | length 144.1
  Top Layer w10: U1.J3-8@3765,2030 3770,2025 3900,2025 P5.13@3905,2020
ESP_Pin_09: P5.12 U1.J3-9 | length 144.1
  Top Layer w10: U1.J3-9@3765,1930 3770,1925 3900,1925 P5.12@3905,1920
ESP_Pin_10: P5.11 U1.J3-10 | length 144.1
  Top Layer w10: U1.J3-10@3765,1830 3770,1825 3900,1825 P5.11@3905,1820
ESP_Pin_13: P5.8 U1.J3-13 | length 144.1
  Top Layer w10: U1.J3-13@3765,1530 3770,1525 3900,1525 P5.8@3905,1520
ESP_Pin_14: P5.7 U1.J3-14 | length 144.1
  Top Layer w10: U1.J3-14@3765,1430 3770,1425 3900,1425 P5.7@3905,1420
ESP_Pin_15: P5.6 U1.J3-15 | length 144.1
  Top Layer w10: U1.J3-15@3765,1330 3770,1325 3900,1325 P5.6@3905,1320
ESP_Pin_16: P5.5 U1.J3-16 | length 144.1
  Top Layer w10: U1.J3-16@3765,1230 3770,1225 3900,1225 P5.5@3905,1220
ESP_Pin_17: P5.4 U1.J3-17 | length 144.1
  Top Layer w10: U1.J3-17@3765,1130 3770,1125 3900,1125 P5.4@3905,1120
ESP_Pin_18: P5.3 U1.J3-18 | length 144.1
  Top Layer w10: U1.J3-18@3765,1030 3770,1025 3900,1025 P5.3@3905,1020
ESP_Pin_19: P5.2 U1.J3-19 | length 144.1
  Top Layer w10: U1.J3-19@3765,930 3770,925 3900,925 P5.2@3905,920
GND: 12V.2 "GND  12V.2" "ST Link 1.2" "ST Link 2.2" C1.2 C2.2 C3.2 C4.2 C5.2 C6.2 C7.2 C8.2 C9.2 C10.2 C13.2 Input1.2 L1.2 L2.2 Output1.2 P4.23 R3.1 R10.1 R11.2 R13.1 U1.J3-1 U2.10 U2.19 U2.22 U2.27 U2.74 U2.99 | length 16246.3
  Top Layer w10: v1(597.25,883.45) 617.43,851.71 623.28,845.85 747.01,722.12 874.13,595 1217.06,595 1267.93,544.13 Output1.2@1275,544.13 ; C13.2@759.08,2647.61 759.08,2340.92 910.87,2189.13 1050.87,2189.13 1223.95,2016.05 1223.95,2007.62 C2.2@1242.57,1989 1298.76,1989 1369.89,1917.87 1369.89,1911.31 1370.67,1910.53 U2.99@1370.67,1887.4 1370.67,1824.99 1391.53,1804.13 v5(1440,1804.13) ; v1(770,954.13) 1045,954.13 1280,1189.13 1280,1284.13 v1@1370.33,1374.47 ; R13.1@797.39,2826.91 801.33,2826.91 808.24,2820 815,2813.24 815,2809.3 825,2799.3 ; 1195,3460 1209.68,3445.32 1209.68,3165.32 1265,3110 1395,3110 1395,3237.5 1492.5,3335 L1.2@1495,3335 ; v1(1237.86,2682.86) 1312.11,2682.86 R11.2@1312.39,2682.57 ; U2.22@1283.07,1406.1 1283.42,1405.76 1363.38,1405.76 v1(1370.33,1398.8) v1@1370.33,1374.47 ; U2.19@1283.07,1465.16 1331.02,1465.16 v1@1358.65,1492.78 ; U2.10@1283.07,1642.32 1337.32,1642.32 1355.33,1660.33 1355.33,1729.46 v1(1360,1734.13) ; U2.27@1370.67,1279.13 1370.33,1279.47 v1@1370.33,1374.47 ; v1(1480,1645) 1735,1645 1830,1740 1830,1775 1854.46,1799.46 1890.99,1799.46 U2.74@1891.34,1799.8 1935.67,1799.8 C4.2@1994.87,1859 ; L2.2@1800,3015 1805,3020 v1(1805,3100) ; L2.2@1810,3032.5 1825,3047.5 1957.5,3047.5 2051.91,3141.91 2096.53,3141.91 R3.1@2097.39,3142.77 2098.26,3141.91 2147.23,3141.91 2184.09,3105.04 C7.2@2230,3105.04 2237.57,3112.61 2272.61,3112.61 2360.17,3200.17 2394.15,3200.17 2412.77,3181.54 R10.1@2412.77,3177.61 2412.77,3120.86 2418.63,3115 2734.96,3115 2756.5,3136.54 2756.5,3156.54 C10.2@2779.96,3180 ; C4.2@1999.87,1867.43 2018.49,1886.05 2056.05,1886.05 2125,1955 v1(2125,1965) ; C3.2@2422.57,2364 2425,2366.43 2425,2456.58 C1.2@2422.57,2459 ; C3.2@2441.2,2386.56 2497.97,2443.34 2497.97,2687.97 2625,2815 3680,2815 U1.J3-1@3765,2730
  Top Layer w30: C13.2@749.87,2656.56 758.49,2665.18 878.6,2665.18 896.17,2682.76 896.17,2816.17 v1(900,2820) 819.95,2820 R13.1@808.24,2820 ; C3.2@2422.57,2364 2422.57,2351.87 2423,2351.44 2423,2178.99 2440,2162 P4.23@2440,2154.13 ; 3101.81,3663.15 3103.15,3661.81 3103.15,3419.71 3119.93,3402.93 3119.93,3395.07
  Bottom Layer w10: Input1.2@225,1200 275,1150 370,1150 565.87,954.13 655,954.13 ; v1(597.25,883.45) 597.25,894.28 609.07,906.1 609.07,908.2 655,954.13 ; v1(770,954.13) 655,954.13 ; 1089.09,2744.09 1413.14,3068.14 ; v1(1370.33,1398.8) 1370.17,1398.97 1370.17,1503.97 v1(1370,1504.13) 1365,1509.13 1365,1729.13 v1(1360,1734.13) 1365,1734.13 1435,1804.13 v5(1440,1804.13) 1480,1764.13 v1(1480,1645) ; 1430,3599.13 1430,3325.32 1427.81,3323.13 1412.96,3064.99 1412.96,2990.86 1418.82,2985 1685,2985 1800,3100 v1(1805,3100) ; v1(2125,1965) 2260,2100 2285,2100 2290,2105 2390.87,2105 P4.23@2440,2154.13
  Bottom Layer w30: v1(900,2820) 1013.18,2820 1089.09,2744.09 1153.18,2680 1235,2680 v1(1237.86,2682.86) ; C6.2@1955,3468.54 1955,3599.13 ; C9.2@2193.81,3468.54 2193.81,3592.94 2200,3599.13 ; P4.23@2435.55,2154.13 P4.23@2440,2154.13 ; C8.2@2785,3505 2965,3505 3093.82,3633.82 3093.82,3665.67 3103.15,3675
  Bottom Layer w50: 12V.2@205,3075 12V.2@245.63,3075 820,3075 1168.31,3423.31 1168.31,3443.09 1185.22,3460 1195,3460 1214.68,3460 1353.82,3599.13 1430,3599.13 1955,3599.13 2200,3599.13 2390.74,3599.13 2480.52,3509.36 C5.2@2489.48,3509.36 ; C5.2@2485,3509.13 2489.26,3509.13 C5.2@2489.48,3509.36 ; C8.2@2785,3505 2780.74,3505 2749.39,3536.35 2730.03,3536.35 2730.03,3549.84 2700.74,3579.13 2559.26,3579.13 C5.2@2489.48,3509.36
NetBT1_1: C13.1 R12.1 R13.2 RESET.1 | length 366.8
  Top Layer w10: C13.1@749.87,2731.36 R12.1@647.61,2731.36 647.61,2791.07 670,2813.47 RESET.1@670,2821.34 670,2829.21 742.5,2901.71 R13.2@797.39,2901.71
NetC6_1: C6.1 C9.1 F1.2 VR1.3 VR2.3 | length 1770.6
  Top Layer w10: VR1.3@2155,3800 2285,3930 2660,3930 2731,3859 2731,3824 VR2.3@2740,3815
  Top Layer w30: F1.2@1755,3374.29 1793.39,3374.29 1837.64,3418.54 C6.1@1955,3418.54 C9.1@2193.81,3418.54 ; VR1.3@2155,3815 2155,3800 2155,3715 2335,3535 v3(2335,3525)
  Bottom Layer w30: C9.1@2193.81,3418.54 2198.49,3413.86 2313.86,3413.86 2335,3435 v3(2335,3525)
NetC7_1: C7.1 R1.1 R3.2 VR1.1 | length 1294
  Top Layer w10: VR1.1@1955,3815 1955,3707.29 1665.24,3417.52 1665.24,3341.42 1720.28,3286.38 1838.68,3286.38 1862.79,3262.27 2048.76,3262.27 2093.46,3217.57 R3.2@2097.39,3217.57 ; R3.2@2098.26,3216.71 C7.1@2211.75,3216.71 ; C7.1@2211.75,3216.71 C7.1@2230,3234.96 ; C7.1@2211.75,3216.71 C7.1@2230,3234.96 ; C7.1@2211.75,3216.71 C7.1@2230,3234.96 ; C7.1@2211.75,3216.71 C7.1@2230,3234.96
  Top Layer w50: R1.1@1922.61,3262.23 1922.69,3262.31 R1.1@1922.78,3262.4
NetC10_1: C10.1 R4.1 R10.2 VR2.1 | length 1070.7
  Top Layer w10: R4.1@2342.39,3757.77 2343.76,3759.13 2534.14,3759.13 2537.07,3762.06 2540,3764.99 ; R10.2@2487.57,3177.61 2500.18,3165 2635.04,3165 C10.1@2650.04,3180 ; VR2.1@2540,3815 2540,3764.99 ; C10.1@2637.52,3167.48 2637.52,3181.62 2621.57,3197.57 2607.43,3197.57 2540,3265 2540,3764.99
NetC11_1: C11.1 U2.12 | length 229.1
  Top Layer w10: C11.1@1070.13,1641.91 1074.74,1637.3 1146.84,1637.3 1181.18,1602.95 U2.12@1283.07,1602.95
NetC11_2: C11.2 Y1.2 | length 165.6
  Top Layer w10: Y1.2@925,1751.46 925,1741.06 949.35,1716.71 C11.2@1070.13,1716.71
NetC12_1: C12.1 U2.13 | length 233.8
  Top Layer w10: C12.1@1069.87,1566.36 1086.23,1550 1143.09,1550 1176.36,1583.27 U2.13@1283.07,1583.27
NetC12_2: C12.2 Y1.1 | length 241.7
  Top Layer w10: Y1.1@925,1416.81 925,1472.21 949.35,1496.56 949.35,1472.94 1051.24,1472.94 C12.2@1069.87,1491.56
NetD1_1: D1.1 SW1.3 SW1.4 | length 750.8
  Top Layer w50: D1.1@1300,3185 1300,3367.51 1560.32,3627.83 1603.45,3627.83 1636.62,3661 SW1.3@1636.62,3704.13 ; SW1.3@1646.93,3704.13 SW1.4@1713.86,3704.13
NetD1_2: D1.2 F1.1 | length 163.3
  Top Layer w50: D1.2@1600,3185 1615,3200 1711.61,3200 1715.24,3203.62 1753.62,3203.62 F1.1@1755,3205
NetL1_1: L1.1 R2.1 | length 143
  Top Layer w10: L1.1@1496.85,3423.15 1507.45,3433.75 R2.1@1595.22,3433.75 ; R2.1@1595.22,3433.75 R2.1@1607.61,3421.36 R2.1@1595.22,3433.75
  Top Layer w30: L1.1@1495,3425 L1.1@1498.7,3421.3
NetL2_1: L2.1 R5.1 | length 937.4
  Top Layer w10: R5.1@802.39,3086.91 1143.09,3086.91 1215,3015 L2.1@1710,3015
NetP6_2: P6.2 U1.J2-19 | length 149.1
  Top Layer w10: P6.2@2620,920 2741.09,920 2751.09,930 U1.J2-19@2765,930
NetP6_3: P6.3 U1.J2-18 | length 149.1
  Top Layer w10: P6.3@2620,1020 2625,1025 2760,1025 U1.J2-18@2765,1030
NetP6_4: P6.4 U1.J2-17 | length 149.1
  Top Layer w10: P6.4@2620,1120 2741.09,1120 2751.09,1130 U1.J2-17@2765,1130
NetP6_5: P6.5 U1.J2-16 | length 145
  Top Layer w10: P6.5@2620,1230 U1.J2-16@2765,1230
NetP6_6: P6.6 U1.J2-15 | length 145
  Top Layer w10: P6.6@2620,1330 U1.J2-15@2765,1330